# Altium PCB PCBGOST.PcbDoc (part 2 of 3)
Units mm, origin at the board's own origin, x right, y up, seen from the top; angles counter-clockwise.
Board outline 200 x 200 mm, 2 copper layers (Top Layer, Bottom Layer), stack 1.64 mm thick; 237 components, 177 nets, 928 pads, 315 vias.
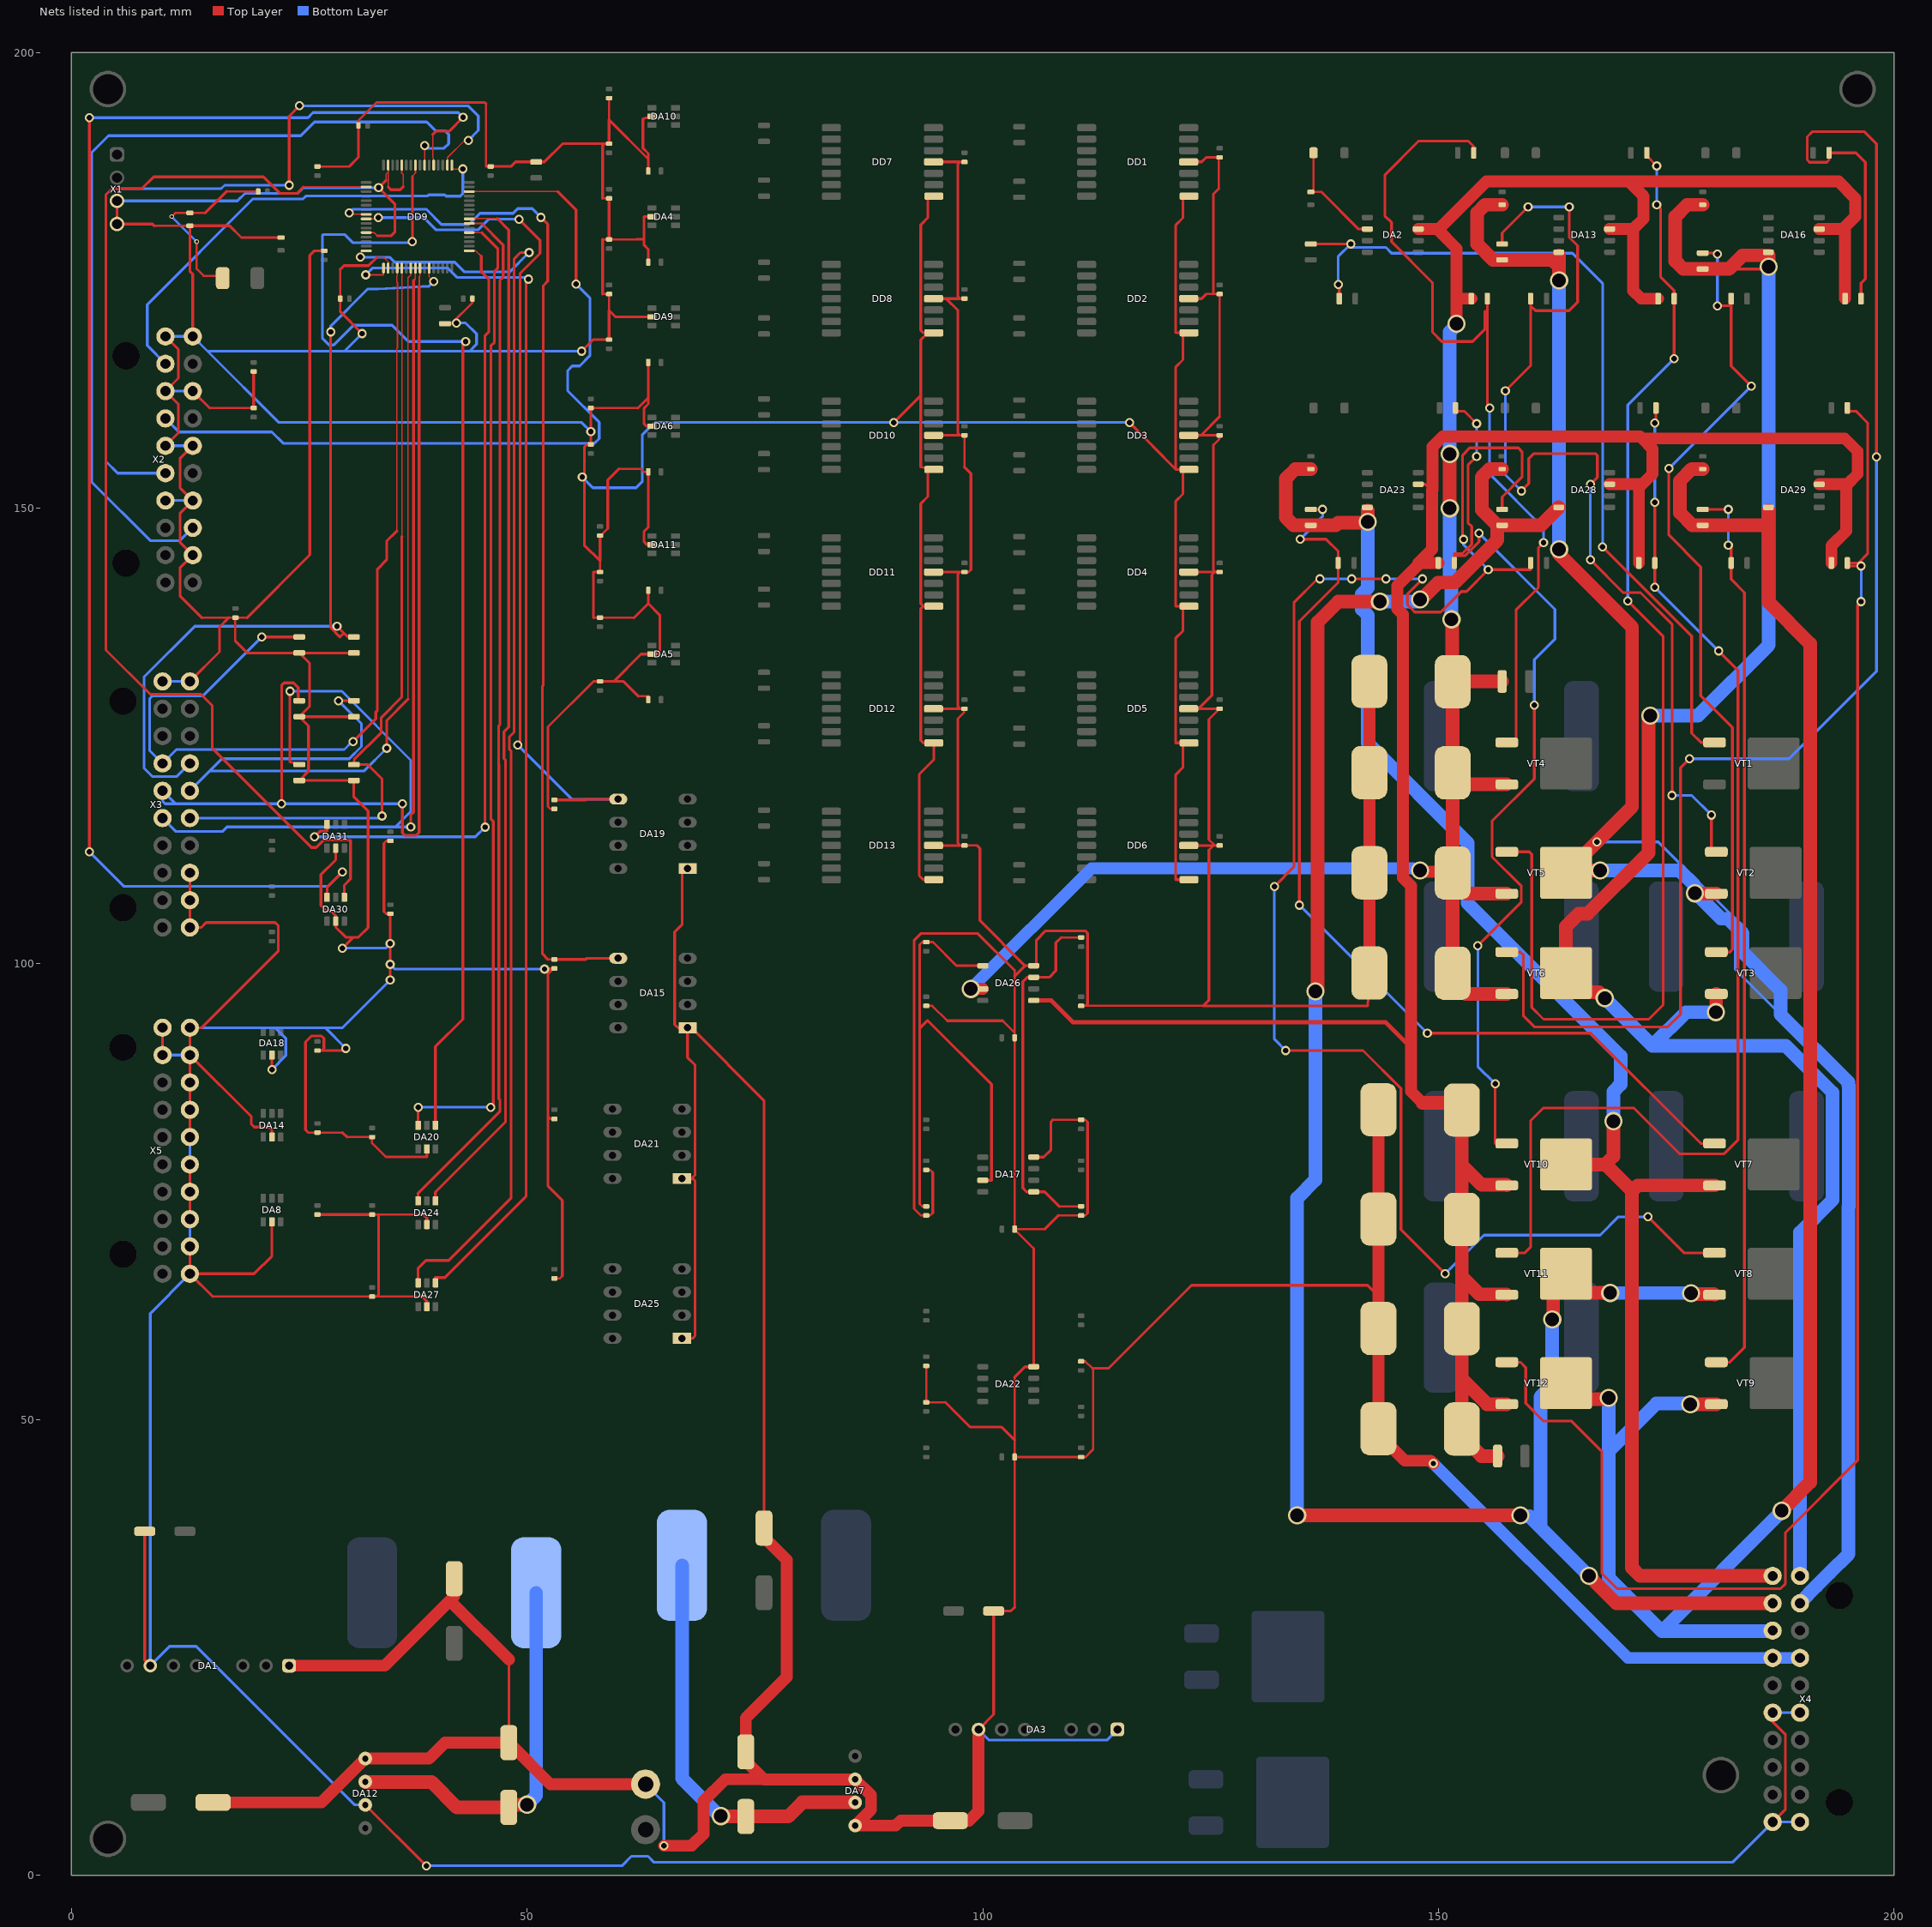
[diagram p2: the nets of this part, all layers, seen from the top]

## Via types
v1: diameter 1, hole 0.6, Top Layer to Bottom Layer, 272 vias
v2: diameter 2, hole 1.5, Top Layer to Bottom Layer, 41 vias
v3: diameter 0.5, hole 0.3, Top Layer to Bottom Layer, 2 vias

## Nets (pads, with @x,y where several pads share a name; then routed paths per layer and width w, separated by ;. In a path a pad name is that pad's centre, name@x,y a point inside that pad or via, vN(x,y) a via of type N, cw(c..) or ccw(c..) an arc to the next point about the centre after c; other vN are vias at no path point) (continued)
D1_2: C45.2 DA23.4 R66.1 VT7.S VT10.D X4.11 | length 179.1
  Top Layer w0.3: DA23.4@142.206,150.095 142.367,150.095 142.367,149.75 142.25,149.75
  Top Layer w1.5: C45.2@136,154.3 134.3,154.3 134.25,154.25 133.25,153.25 133.25,149.004 134.129,148.125 R66.1@136,148.125 138.74,148.125 139.019,148.404 142.154,148.404 v2(142.25,148.5) 142.25,149.75 ; VT10.D@165.5,76.5 VT10.D@164,78 168.321,78 ; v2(169.2,82.75) 169.2,78.879 168.321,78 ; VT7.S@180.3,75.7 171.879,75.7 171.25,75.071 ; X4.11@186.68,32.85 172.129,32.85 171.25,33.729 171.25,75.071 ; 168.321,78 171.25,75.071
  Bottom Layer w1.5: v2(142.25,148.5) 142.25,141.242 141.588,140.58 141.588,138.92 142.25,138.258 142.25,124.237 153.204,113.283 153.204,106.683 170,89.887 170,86.786 169.214,86 169.214,82.764 v2(169.2,82.75)
D2_1: C35.2 DA13.4 R45.1 VT2.S VT5.D X4.2 | length 232.6
  Top Layer w0.3: DA13.4@163.206,178.095 163.373,178.095 163.373,177.75 163.25,177.75 ; VT5.D@164,110 164.25,110.25 v1(167.386,113.386)
  Top Layer w1.5: C35.2@157,183.3 155.129,183.3 154.25,182.421 154.25,179 156,177.25 R45.1@157,177.25 162.5,177.25 163.25,176.5 ; v2(163.25,145.5) 163.25,144.954 171.254,136.95 171.254,117.254 164.25,110.25 v2(167.75,110.25) ; v2(163.25,175) 163.25,176.5 ; 163.25,177.75 163.25,176.5 ; v2(178.154,107.75) 178.179,107.725 180.475,107.725 VT2.S@180.5,107.7 ; X4.2@189.68,29.85 X4.2@189.776,29.754
  Bottom Layer w0.3: v1(167.386,113.386) 174.142,113.386 182.575,104.953 182.575,99.416 187.545,94.445
  Bottom Layer w1.5: v2(163.25,145.5) 163.25,147.45 v2(163.25,175) ; v2(167.75,110.25) 176.487,110.25 178.058,108.679 178.058,107.846 v2(178.154,107.75) ; v2@177.994,107.583 178.039,107.628 178.359,107.628 181.024,104.963 181.774,104.963 183.382,103.355 183.382,101.281 187.55,97.113 187.55,94.45 195,87 195,86.683 195.05,86.633 195.05,73.367 195,73.317 195,35.241 192.963,33.204 191.496,31.737 189.68,29.921 X4.2@189.68,29.85
D2_2: C48.2 DA28.4 R79.1 VT8.S VT11.D X4.12 | length 242.6
  Top Layer w1.5: v2(134.5,39.5) v2(159,39.5) ; v2(136.5,97) 136.75,97.25 136.75,137.5 139,139.75 v2(143.592,139.75) ; v2(148,140) 148.135,140 149.986,141.851 151.806,141.851 156.468,146.512 R79.1@156.468,148.125 ; C48.2@157,154.3 155.629,154.3 154.75,153.421 154.75,149.843 R79.1@156.468,148.125 ; v2(162.5,61) 162.5,61.35 162.6,61.45 162.6,64.6 VT11.D@164,66 166.1,63.9 168.175,63.9 v2(168.854,63.9) ; DA28.4@163.206,150.095 161.236,148.125 R79.1@157,148.125 R79.1@156.468,148.125 ; v2(166.525,32.85) 169.525,29.85 X4.12@186.68,29.85 ; v2(177.725,63.875) 177.812,63.787 180.213,63.787 VT8.S@180.3,63.7
  Bottom Layer w1.5: v2(134.5,39.5) 134.5,74.296 136.5,76.296 v2(136.5,97) ; v2(143.592,139.75) 147.615,139.75 147.865,140 v2(148,140) ; v2(159,39.5) 159.096,39.404 159.971,39.404 161.196,38.179 ; v2(162.5,61) 162.5,53.794 161.196,52.49 161.196,38.179 ; v2(166.525,32.85) 161.196,38.179 ; v2(168.854,63.9) 168.867,63.888 177.713,63.888 v2(177.725,63.875)
D3_1: C41.2 DA16.4 R49.1 VT3.S VT6.D X4.1 | length 219.7
  Top Layer w0.3: R49.1@179,176.25 181.875,176.25 185.369,176.25 185.903,176.784 185.903,178.095 DA16.4@186.206,178.095
  Top Layer w1.5: v2(168.25,96.25) 167.6,96.9 166.1,96.9 VT6.D@164,99 164,104.1 165.412,105.512 166.388,105.512 173.054,112.177 173.054,127.046 v2(173.258,127.25) ; C41.2@179,183.3 177.3,183.3 176,182 176,177.129 176.879,176.25 R49.1@179,176.25 181.875,176.25 183.375,177.75 186.206,177.75 186.25,177.75 v2(186.25,176.5) ; v2(180.458,94.708) 180.479,94.729 180.479,96.679 VT3.S@180.5,96.7
  Bottom Layer w1.5: v2(168.25,96.25) 173.479,91.021 ; v2(173.258,127.25) 178.5,127.25 186.25,135 186.25,137.95 v2(186.25,176.5) ; v2(180.458,94.708) 177.167,94.708 173.479,91.021 ; X4.1@189.68,32.85 189.68,70.543 193.25,74.113 193.25,85.887 188.116,91.021 173.479,91.021
D3_2: C51.2 DA29.4 R98.1 VT9.S VT12.D X4.13 | length 221.1
  Top Layer w0.3: DA29.4@186.206,150.095 186.385,150.095 186.385,149.75 186.25,149.75
  Top Layer w1.5: VT12.D@164,54 165.75,52.25 168.425,52.25 168.55,52.375 v2(168.7,52.375) ; v2(177.65,51.675) 177.663,51.688 180.488,51.688 VT9.S@180.5,51.7 ; C51.2@179,154.3 177.8,154.3 176.5,153 176.5,149.5 177.875,148.125 R98.1@179,148.125 186.125,148.125 186.25,148 ; 186.25,149.75 186.25,148 ; v2(187.676,40) 190.8,43.124 190.8,135.129 186.25,139.679 186.25,148
  Bottom Layer w0.3: 174.525,26.775 183.62,26.775 ; 183.657,26.812 183.62,26.775 ; X4.13@186.617,26.775 183.62,26.775
  Bottom Layer w1.5: v2(168.7,52.375) 168.7,46.55 ; v2(177.65,51.675) 177.225,51.675 177.125,51.775 173.925,51.775 168.7,46.55 ; X4.13@186.68,26.85 186.68,26.775 174.525,26.775 ; v2(187.676,40) 187.676,39.926 174.525,26.775 ; 168.7,46.55 168.7,32.6 174.525,26.775
DPR1_1: DA20.6 DD9.37 | length 108.6
  Top Layer w0.15: DD9.37@43.65,180.25 45.034,180.25
  Top Layer w0.3: DA20.6@38.05,82.3 v1(38.05,84.277) ; 45.034,180.25 46.782,178.502 46.782,176.329 46.421,175.968 46.421,168.215 46.025,167.819 46.025,115.915 46.294,115.646 46.294,84.546 v1(46.025,84.277)
  Bottom Layer w0.3: v1(38.05,84.277) v1(46.025,84.277)
DPR1_2: DA24.4 DD9.40 | length 114.9
  Top Layer w0.15: DD9.40@43.65,181.75 44.132,181.75 44.17,181.788 46.736,181.788
  Top Layer w0.3: DA24.4@39.95,74 39.95,74.968 47.63,82.649 47.63,122.368 47.467,122.531 47.467,125.489 47.982,126.003 47.982,180.542 46.736,181.788
DPR2_1: DA20.4 DD9.57 | length 135.2
  Top Layer w0.15: 37.414,186.436 37.75,186.772 DD9.57@37.75,187.65
  Top Layer w0.3: v1(37.414,179.248) 37.414,186.436 ; DA20.4@39.95,82.3 39.95,90.932 42.951,93.933 42.951,167.996 v1(43.256,168.3)
  Bottom Layer w0.3: v1(37.414,179.248) 37.313,179.146 30.867,179.146 29.972,180.041 27.641,180.041 27.534,179.934 27.534,168.656 28.27,167.919 28.778,167.919 30.937,170.078 35.204,170.078 36.982,168.3 v1(43.256,168.3)
DPR2_2: DA27.6 DD9.16 | length 141.6
  Top Layer w0.15: v1(31.699,177.546) 31.801,177.648 31.801,178.25 DD9.16@32.35,178.25
  Top Layer w0.3: DA27.6@38.05,65 38.05,66.624 38.888,67.462 41.402,67.462 48.235,74.295 48.235,123.385 48.067,123.553 48.067,124.939 48.582,125.454 48.582,177.36 49.276,178.054 v1(50.217,178.054)
  Bottom Layer w0.3: v1(31.699,177.546) 34.923,177.546 35.473,176.996 42.074,176.996 43.14,175.931 48.093,175.931 v1(50.217,178.054)
DPR3_1: DA24.6 DD9.39 | length 113.6
  Top Layer w0.15: DD9.39@43.65,181.25 45.009,181.25
  Top Layer w0.3: DA24.6@38.05,74 38.05,74.848 47.03,83.829 47.03,85.062 46.911,85.181 46.911,121.888 46.867,121.931 46.867,126.089 47.021,126.242 47.021,175.007 47.382,175.368 47.382,178.877 45.009,181.25
DPR3_2: DA27.4 DD9.17 | length 136.3
  Top Layer w0.15: v1(32.301,175.609) 34.25,175.609 DD9.17@34.25,176.35
  Top Layer w0.3: DA27.4@39.95,65 39.95,65.589 40.98,65.589 49.886,74.495 49.886,174.879 v1(50.14,175.133)
  Bottom Layer w0.3: v1(32.301,175.609) 33.065,176.373 41.262,176.373 42.305,175.331 49.942,175.331 v1(50.14,175.133)
DPS_1: DD9.24 R83.2 X3.5 | length 122.8
  Top Layer w0.15: 37.592,175.026 37.725,175.159 37.725,175.854 37.75,175.879 DD9.24@37.75,176.35
  Top Layer w0.3: v1(23.978,129.921) 23.978,122.174 R83.2@25,121.875 ; v1(37.236,115.037) 37.236,116.332 37.55,116.646 37.55,174.984 37.592,175.026
  Bottom Layer w0.3: X3.5@10,116 11.471,114.529 16.555,114.529 17.063,115.037 35.56,115.037 ; v1(23.978,129.921) 29.667,129.921 37.236,122.352 37.236,116.713 35.56,115.037 ; v1(37.236,115.037) 35.56,115.037
DPS_2: DD9.25 R89.2 X3.6 | length 113.5
  Top Layer w0.15: 38.175,174.379 38.175,175.429 38.25,175.504 DD9.25@38.25,176.35
  Top Layer w0.3: v1(23.063,117.577) 23.063,130.556 23.343,130.835 24.384,130.835 24.892,130.327 24.892,128.875 R89.2@25,128.875 ; v1(36.322,117.577) 36.322,114.376 36.576,114.122 37.846,114.122 38.151,114.427 38.151,174.354 38.175,174.379
  Bottom Layer w0.3: v1(36.322,117.577) v1(23.063,117.577) 11.423,117.577 ; 11.423,117.577 X3.6@10,119 10,117.856 10.279,117.577 11.423,117.577
DPS_3: DD9.20 R90.2 X3.7 | length 102.9
  Top Layer w0.15: 35.7,147.502 35.7,167.581 35.775,167.581 35.775,174.775 35.7,174.775 35.7,175.463 35.75,175.513 DD9.20@35.75,176.35
  Top Layer w0.3: v1(20.889,135.875) R90.2@25,135.875 ; v1(30.912,124.384) 33.401,126.873 33.401,127.65 33.579,127.827 33.579,143.322 34.59,144.334 34.59,146.392 35.7,147.502
  Bottom Layer w0.3: v1(20.889,135.875) 14.427,129.413 8.89,129.413 8.585,129.108 8.585,123.415 X3.7@10,122 11.52,123.52 29.947,123.52 30.81,124.384 v1(30.912,124.384)
DPS_4: DD9.21 R93.2 X3.15 | length 85.7
  Top Layer w0.15: DD9.21@36.25,176.35 36.25,175.895 36.271,175.874 36.271,146.914
  Top Layer w0.3: R93.2@31,121.875 R93.2@31.013,121.875 ; v1(34.087,116.23) 34.087,120.3 32.512,121.875 R93.2@31.013,121.875 ; 36.271,146.914 36.246,146.888 36.246,129.284 34.001,127.04 34.001,125.391 31.013,122.403 R93.2@31.013,121.875
  Bottom Layer w0.3: X3.15@13,116 33.856,116 v1(34.087,116.23)
DPS_5: DD9.23 R95.2 X3.16 | length 102.9
  Top Layer w0.15: 36.941,129.055 36.941,175.294 37.25,175.604 DD9.23@37.25,176.35
  Top Layer w0.3: v1(29.312,128.875) R95.2@31,128.875 ; v1(34.601,123.667) 34.601,126.716 36.941,129.055
  Bottom Layer w0.3: X3.16@13,119 15.158,121.158 ; v1(29.312,128.875) 31.826,126.36 31.826,123.85 30.48,122.504 16.504,122.504 15.158,121.158 ; v1(34.601,123.667) 32.093,121.158 15.158,121.158
DPS_6: DD9.27 R96.2 X3.17 | length 91.9
  Top Layer w0.15: DD9.27@39.25,176.35 39.25,175.377 v1(39.758,174.869)
  Top Layer w0.3: v1(28.448,169.345) 28.448,136.891 29.464,135.875 29.896,136.307 ; v1(29.144,137.058) 29.896,136.307 ; R96.2@31,135.875 30.328,135.875 29.896,136.307
  Bottom Layer w0.3: X3.17@13,122 11.574,120.574 8.865,120.574 7.976,121.463 7.976,131.496 13.538,137.058 v1(29.144,137.058) ; v1(28.448,169.345) 28.448,169.991 32.512,174.055 33.666,174.055 39.25,174.361 v1(39.758,174.869)
G1_1: R38.2 R40.1 VT1.G | length 97
  Top Layer w0.3: R38.2@136,179 v1(140.376,179) ; v1(139.014,174.549) 139.125,174.438 R40.1@139.125,173 ; v1(168.021,145.745) 177.8,135.966 177.8,125.316 178.816,124.3 VT1.G@180.3,124.3
  Bottom Layer w0.3: v1(139.014,174.549) 139.014,177.638 v1(140.376,179) 140.376,178.619 144.235,178.619 144.862,177.991 164.705,177.991 168.021,174.676 v1(168.021,145.745)
G1_2: R66.2 R68.1 VT7.G | length 107.3
  Top Layer w0.3: v1(134.747,106.451) 134.747,137.592 139,141.845 R68.1@139,144 139,145.288 137.679,146.609 v1(134.823,146.609) ; R66.2@136,149.875 v1(137.297,149.875) ; v1(148.793,92.405) 166.7,92.405 178.805,80.3 VT7.G@180.3,80.3
  Bottom Layer w0.3: v1(134.747,106.451) v1(148.793,92.405) ; v1(134.823,146.609) 137.297,149.083 v1(137.297,149.875)
G2_1: R45.2 R46.1 VT2.G | length 113.3
  Top Layer w0.3: R45.2@157,179 157,180.216 v1(159.842,183.058) ; v1(157.353,162.89) 160.125,165.662 160.125,172.212 ; v1(159.106,151.892) 159.918,152.705 159.918,155.448 160.452,155.981 167.259,155.981 167.437,155.804 167.437,153.391 v1(166.675,152.629) ; R46.1@160.125,173 160.125,172.212 ; v1(164.363,183.058) 164.363,179.723 165.278,178.808 165.278,172.618 164.338,171.679 160.658,171.679 160.125,172.212 ; v1(166.675,144.336) 170.269,140.741 172.176,140.741 175.641,137.277 v1(175.641,118.491) ; v1(179.959,116.332) 179.959,112.3 VT2.G@180.5,112.3
  Bottom Layer w0.3: v1(157.353,162.89) 157.353,153.645 v1(159.106,151.892) ; v1(159.842,183.058) v1(164.363,183.058) ; v1(166.675,144.336) v1(166.675,152.629) ; v1(175.641,118.491) 177.8,118.491 v1(179.959,116.332)
G2_2: R79.2 R81.1 VT8.G | length 184.3
  Top Layer w0.3: v1(132,108.5) 134.147,110.647 134.147,139.647 136.75,142.25 v1(137,142.25) ; v1(133.25,90.5) 141.733,90.5 145.9,86.333 145.9,70.85 v1(150.75,66) ; v1(140.5,142.25) v1(144.25,142.25) ; v1(148.25,142.25) 148.25,142.236 146.596,140.582 146.596,139.418 147.196,138.818 147.418,138.596 150.249,138.596 150.453,138.8 152.512,140.859 153.076,140.859 v1(155.473,143.256) 160.125,143.256 R81.1@160.125,144 ; v1(152.756,146.583) 152.654,146.685 152.654,155.829 153.441,156.616 158.775,156.616 159.182,156.21 159.182,153.416 157,151.234 R79.2@157,149.875 ; v1(173,72.25) 176.95,68.3 VT8.G@180.3,68.3
  Bottom Layer w0.3: v1@131.999,108.251 v1@131.999,108.499 ; v1@132,108.25 132,91.75 v1(133.25,90.5) ; v1(137,142.25) v1(140.5,142.25) ; v1(144.25,142.25) v1(148.25,142.25) ; v1(150.75,66) 155,70.25 167.75,70.25 169.75,72.25 v1(173,72.25) ; v1(152.756,146.583) 152.756,145.974 v1(155.473,143.256)
G3_1: R49.2 R51.1 VT3.G | length 89.7
  Top Layer w0.3: v1(175.285,154.356) 175.285,147.066 178.791,143.561 178.791,129.413 182.27,125.933 182.27,101.6 181.97,101.3 VT3.G@180.5,101.3 ; R49.2@179,178 180.496,178 v1(180.619,177.876) ; v1(180.619,172.212) 182.125,172.212 ; R51.1@182.125,173 182.125,172.212 ; v1(184.328,163.398) 182.125,165.601 182.125,172.212
  Bottom Layer w0.3: v1(175.285,154.356) v1(184.328,163.398) ; v1(180.619,172.212) v1(180.619,177.876)
G3_2: R98.2 R100.1 VT9.G | length 99.3
  Top Layer w0.3: R98.2@179,149.875 v1(181.813,149.875) ; VT9.G@180.5,56.3 181.979,56.3 183.591,57.912 183.591,140.748 182.125,142.215 R100.1@182.125,144 182.125,145.637 v1(181.813,145.948)
  Bottom Layer w0.3: v1(181.813,145.948) v1(181.813,149.875)
G4_1: R41.1 R42.1 VT4.G | length 94.1
  Top Layer w0.3: R41.1@153.875,189 153.875,189.685 153.264,190.297 147.853,190.297 144.12,186.563 144.12,182.09 144.854,181.356 144.854,179.235 149.352,174.737 149.352,169.316 150.368,168.3 153.746,168.3 155.118,169.672 155.118,171.615 155.375,171.615 ; R42.1@155.375,173 155.375,171.615 ; v1(155.626,161.013) 155.375,161.264 155.375,171.615 ; VT4.G@157.5,124.3 158.521,124.3 158.521,138.836 160.98,141.295 160.98,145.664 v1(161.544,146.228)
  Bottom Layer w0.3: v1(155.626,161.013) 155.626,153.746 161.544,147.828 v1(161.544,146.228)
G4_2: R71.1 R73.1 VT10.G | length 104.1
  Top Layer w0.3: R71.1@151.875,161 151.875,160.655 152.832,160.655 v1(154.203,159.283) ; v1(154.203,155.677) 153.254,154.727 153.254,148.402 153.66,147.996 153.66,146.05 152.639,145.029 151.75,145.029 R73.1@151.75,144 151.75,144.78 152.908,144.78 154.457,146.329 v1(154.457,147.244) ; v1(154.33,102.006) 159.106,106.782 159.106,108.534 155.88,111.76 155.88,115.672 160.528,120.32 v1(160.528,128.397) ; v1(156.235,86.843) 156.235,80.3 VT10.G@157.5,80.3
  Bottom Layer w0.3: v1(154.203,155.677) v1(154.203,159.283) ; v1(154.33,102.006) 154.33,88.748 v1(156.235,86.843) ; v1(154.457,147.244) 162.789,138.913 162.789,135.636 160.528,133.375 v1(160.528,128.397)
G5_1: R47.1 R48.1 VT5.G | length 133.7
  Top Layer w0.3: VT5.G@157.5,112.3 159.969,112.3 160.249,112.021 160.249,95.225 161.544,93.929 173.076,93.929 174.676,95.529 174.676,135.941 v1(170.79,139.827) ; R47.1@172.875,189 172.875,188.646 v1(173.965,187.556) ; v1(173.965,183.312) 174.371,182.905 174.371,175.412 175.875,173.908 R48.1@175.875,173 v1(175.875,166.426)
  Bottom Layer w0.3: v1(170.79,139.827) 170.79,161.341 v1(175.875,166.426) ; v1(173.965,183.312) v1(173.965,187.556)
G5_2: R88.1 R91.1 VT11.G | length 126.9
  Top Layer w0.3: VT11.G@157.5,68.3 159.512,68.3 160.122,68.91 160.122,82.779 161.544,84.201 171.425,84.201 176.454,79.172 181.356,79.172 182.88,80.696 182.88,132.207 v1(180.746,134.341) ; v1(173.75,141.337) R91.1@173.75,144 v1(173.75,150.659) ; v1(173.75,159.36) 173.875,159.485 R88.1@173.875,161
  Bottom Layer w0.3: v1(173.75,141.337) v1(180.746,134.341) ; v1(173.75,150.659) v1(173.75,159.36)
G6_1: R53.1 R56.1 VT6.G | length 171.6
  Top Layer w0.3: VT6.G@157.5,101.3 159.004,101.3 159.334,100.97 159.334,94.285 160.528,93.091 175.184,93.091 176.581,94.488 176.581,121.514 v1(177.571,122.504) ; R56.1@196.375,173 196.375,174.701 196.85,175.176 196.85,187.96 195.809,189.001 192.875,189.001 R53.1@192.875,189 192.875,188.214 192.621,187.96 190.729,187.96 190.475,188.214 190.475,190.754 191.033,191.313 196.748,191.313 198.069,189.992 v1(198.069,155.651)
  Bottom Layer w0.3: v1(177.571,122.504) 188.468,122.504 198.069,132.105 v1(198.069,155.651)
G6_2: R102.1 R103.1 VT12.G | length 188.3
  Top Layer w0.3: VT12.G@157.5,56.3 159.004,56.3 159.588,55.716 159.588,51.791 161.544,49.835 164.617,49.835 167.929,46.523 167.929,33.143 169.627,31.445 187.528,31.445 188.087,32.004 188.087,37.615 196.012,45.54 196.012,139.37 v1(196.393,139.751) ; R103.1@194.875,144 R103.1@194.875,143.993 ; R102.1@194.875,161 194.875,160.655 195.828,160.655 197.104,159.379 197.104,145.009 196.088,143.993 R103.1@194.875,143.993 ; v1(196.393,143.662) 194.875,143.662 R103.1@194.875,143.993
  Bottom Layer w0.3: v1(196.393,139.751) v1(196.393,143.662)
GND: C1.2 C2.2 C3.2 C4.2 C5.2 C6.2 C7.2 C8.2 C12.2 C13.2 C14.2 C15.2 C16.2 C20.2 C21.2 C31.2 C32.2 C33.2 C34.2 C50.1 C52.1 C53.1 DA1.1 DA3.1 DA3.7 DA7.1 DA7.3 DA12.1 DA15.1 DA17.8 DA19.1 DA21.1 DA22.8 DA25.1 DA26.8 DD1.11 DD2.11 DD3.11 DD4.11 DD5.11 DD6.11 DD7.11 DD8.11 DD10.11 DD11.11 DD12.11 DD13.11 R52.2 R55.1 R58.2 R59.2 R60.2 R61.2 R62.2 R64.1 R69.2 R70.1 R76.2 R78.1 R82.1 R84.2 R85.2 R86.2 R87.2 R94.1 X4.4 X4.14 X6.2 | length 989.1
  Top Layer w0.25: 92.481,73.152 93.233,72.4 R52.2@93.8,72.4 94.234,72.4 94.513,72.679 ; R70.1@93.8,55.9 R69.2@93.8,51.9 95.91,51.9 ; R55.1@93.8,77.4 94.234,77.4 94.513,77.121 ; R82.1@93.8,95.4 94.469,95.4 96.096,93.774 ; 97.282,113.254 97.536,113 C15.2@98,113 99.365,113 ; 97.282,126.924 97.942,127.584 C14.2@97.942,128 ; 97.282,128.254 97.536,128 C14.2@97.942,128 ; 97.282,142.746 97.536,143 C13.2@98,143 98.448,143 98.704,143.256 ; 97.282,158.254 97.536,158 C12.2@97.993,158 ; 97.282,173.254 97.536,173 C8.2@98,173 ; 97.282,187.746 97.536,188 C7.2@98,188 ; 97.993,154.508 C12.2@97.993,158 ; C14.2@98,128 C14.2@97.942,128 ; C12.2@98,158 C12.2@97.993,158 ; 102.182,93.774 103.5,92.456 ; 103.5,29.401 C52.1@103.5,45.9 103.5,47.752 103.5,54.657 ; 103.5,99.294 103.5,98.657 103.5,92.456 ; 105.613,68.778 C50.1@103.5,70.891 ; 106.782,70.891 C50.1@103.5,70.891 ; 107.706,82.9 R64.1@110.8,82.9 111.252,82.9 111.506,82.646 ; 108.29,72.4 R58.2@110.8,72.4 111.252,72.4 111.506,72.654 ; R76.2@110.8,45.9 111.28,45.9 112.116,46.736 112.116,55.636 ; R78.1@110.8,56.4 111.265,56.4 112.029,55.636 112.116,55.636 ; R94.1@110.8,95.4 111.252,95.4 ; 111.506,95.654 111.252,95.4 ; 113.807,55.636 112.116,55.636 ; 124.204,95.4 111.252,95.4 ; 124.528,173.5 125.298,173.5 C2.2@126,173.5 126,160.048 ; 124.528,188.5 C1.2@125.908,188.5 ; 124.816,113.66 125.4,113.076 ; 124.816,126.832 125.984,128 C5.2@126,128 ; 124.826,112.503 125.324,113 125.4,113.076 ; 125.146,142.67 125.476,143 125.554,143 ; 125.298,143.256 125.554,143 ; 125.298,156.947 125.959,157.607 125.959,158 C3.2@126,158 ; 125.908,185.064 C1.2@125.908,188.5 ; C6.2@126,113 125.476,113 125.4,113.076 ; C4.2@126,143 125.554,143 ; C1.2@126,188.5 C1.2@125.908,188.5 ; C50.1@103.5,70.891 C50.1@103.5,70.9 C53.1@103.5,91.9 103.5,92.456
  Top Layer w0.3: 42,29.679 42,30.621 ; C34.2@48,14.55 48,23.679 ; DA25.1@67,58.92 68.166,58.92 68.428,59.182 68.428,76.2 68.168,76.46 68.072,76.46 ; DA21.1@67,76.46 68.072,76.46 ; DA19.1@67.62,110.46 67.031,110.46 67.031,104.343 66.192,103.505 66.192,93.356 66.548,93 DA15.1@67.615,93 ; C32.2@74,12.548 C32.2@74,13.55 ; C31.2@76,38.1 76,85.021 68.021,93 DA15.1@67.62,93 DA15.1@67.615,93 ; 76.032,10.516 76.008,10.54 DA7.3@86,10.54 DA7.3@86,10.516 ; 92.481,73.152 92.481,102.616 93.193,103.327 99.466,103.327 103.5,99.294 ; 94.513,72.679 94.513,77.121 ; DD13.11@94.6,113 97.536,113 ; DD12.11@94.6,128 97.536,128 ; DD11.11@94.6,143 97.536,143 ; DD10.11@94.6,158 97.536,158 ; DD8.11@94.6,173 95.986,173 ; DD7.11@94.6,188 97.536,188 ; 95.91,51.9 98.636,49.174 102.078,49.174 103.5,47.752 ; 96.096,93.774 102.182,93.774 ; 97.282,113.254 97.282,126.924 ; 97.282,128.254 97.282,142.746 ; 97.282,158.254 97.282,171.704 95.986,173 ; 97.282,173.254 97.282,187.746 ; 97.536,173 95.986,173 ; 97.993,154.508 98.704,153.797 98.704,143.256 ; 99.365,113 99.695,112.67 99.695,104.758 104.648,99.805 ; DA3.7@99.54,16 101.2,17.66 C21.2@101.2,29 103.099,29 103.5,29.401 ; C52.1@103.5,45.9 R76.2@110.8,45.9 ; 103.5,54.657 104.648,55.805 DA22.8@105.594,55.805 105.613,55.805 105.613,68.778 ; 103.5,98.657 104.648,99.805 ; DA17.8@105.594,78.805 106.68,78.805 107.493,79.618 107.493,82.686 107.706,82.9 ; 106.782,70.891 108.29,72.4 ; 111.506,72.654 111.506,82.646 ; 111.506,95.654 111.506,103.378 111.252,103.632 106.909,103.632 105.893,102.616 105.893,99.805 DA26.8@105.594,99.805 104.648,99.805 ; 113.807,55.636 122.915,64.745 142.24,64.745 143.425,63.56 ; DD6.11@122.6,113 124.282,113 125.324,113 125.476,113 ; DD5.11@122.6,128 123.682,128 ; DD4.11@122.6,143 125.476,143 ; DD3.11@122.6,158 123.952,158 ; DD2.11@122.6,173 124.028,173 124.528,173.5 ; DD1.11@122.6,188 124.028,188 124.528,188.5 ; 124.816,113.66 124.816,126.832 ; 124.826,112.503 124.826,96.023 124.204,95.4 142.245,95.4 R59.2@142.425,99 ; 125.146,142.67 125.146,129.464 123.682,128 ; 125.298,143.256 125.298,156.947 ; 125.298,173.5 125.298,184.455 125.908,185.064 ; C3.2@125.959,158 123.952,158 ; C5.2@125.984,128 123.682,128 ; 126,160.048 123.952,158 ; R84.2@143.425,48.387 R84.2@143.425,49 ; DA15.1@67.615,93 67.615,89.738 68.428,88.925 68.428,76.816 68.072,76.46
  Top Layer w1.3: C16.2@15.55,8 27.44,8 DA12.1@32.25,12.81 39.243,12.81 40.983,14.55 C34.2@48,14.55 52.55,10 X6.2@63,10 ; DA1.1@23.89,23 34.379,23 42,30.621 C33.2@42,32.55 ; 42,29.679 48,23.679 ; v1(65.024,3.251) 68.072,3.251 69.367,4.547 69.367,8.153 71.754,10.54 76.008,10.54 C32.2@74,12.548 ; C32.2@74,13.55 74,17.247 78.5,21.747 78.5,34.6 76.275,36.825 76.275,37.825 C31.2@76,38.1 ; 76.032,10.516 DA7.3@86,10.516 ; DA7.3@86,10.54 87.75,8.79 87.75,7.21 DA7.1@86,5.46 90.455,5.46 90.995,6 C20.2@96.45,6 98.501,6 99.54,7.039 DA3.7@99.54,16 ; R59.2@142.425,99 R60.2@142.425,110 R61.2@142.425,121 R62.2@142.425,131 ; R84.2@143.425,48.387 146.312,45.5 149.14,45.5 v1(149.454,45.187) ; R84.2@143.425,49 R85.2@143.425,60 143.425,63.56 R86.2@143.425,72 R87.2@143.425,84
  Bottom Layer w0.3: X6.2@63,10 65.024,7.976 v1(65.024,3.251) ; DA3.7@99.54,16 100.706,14.834 113.614,14.834 DA3.1@114.78,16
  Bottom Layer w1.3: v1(149.454,45.187) 170.79,23.85 X4.14@186.68,23.85 X4.4@189.68,23.85
GNDD: C9.2 C10.2 C11.2 C17.2 C18.2 C22.2 C23.2 C24.2 C25.2 C26.2 C27.2 C28.1 C29.1 C30.1 C36.2 C37.1 C38.1 C39.1 C40.2 C43.2 C44.2 C46.2 C49.2 C54.2 C55.2 DA1.7 DA4.2 DA5.2 DA6.2 DA8.2 DA9.2 DA10.2 DA11.2 DA12.3 DA14.2 DA18.2 DA20.2 DA24.2 DA27.2 DA30.2 DA31.2 DD1.8 DD2.8 DD3.8 DD4.8 DD5.8 DD6.8 DD7.8 DD8.8 DD9.12 DD9.18 DD9.60 DD9.63 DD10.8 DD11.8 DD12.8 DD13.8 R9.2 R10.2 R11.2 R16.2 R17.2 R22.2 R23.2 R24.2 R25.2 R26.2 R31.2 R36.2 R39.1 R43.1 R44.1 R54.2 R63.2 R72.2 R77.2 R83.1 R89.1 R90.1 R93.1 R95.1 R96.1 X1.3 X1.4 X2.4 X2.6 X2.8 X2.10 X2.12 X2.14 X2.16 X2.18 X2.20 X3.10 X3.11 X3.12 X3.13 X3.20 X4.6 X4.10 X4.16 X4.20 X5.9 X5.10 X5.11 X5.12 X5.13 X5.14 X5.15 X5.16 X5.17 X5.18 X5.19 X5.20 | length 1412.4
  Top Layer w0.15: DD9.12@32.35,180.25 33.223,180.25 33.59,179.883 ; 33.519,177.521 34.29,177.521 34.75,177.061 DD9.18@34.75,176.35 ; 34.517,185.977 34.517,186.673 34.75,186.906 ; 34.75,185.249 34.75,186.906 ; DD9.63@34.75,187.65 34.75,186.906 ; DD9.60@36.25,187.65 36.25,186.762 36.414,186.598 36.414,185.293
  Top Layer w0.25: 9.08,181 C18.2@13,181 13,175.996 ; 14.298,138 17.272,138 R39.1@17.983,138 ; 15.17,161 R43.1@20,161 ; 15.5,63.5 C49.2@33,63.5 33.452,63.5 ; 17.983,135.446 R39.1@17.983,138 ; 19.279,138 R39.1@18,138 R39.1@17.983,138 ; 25.993,81.5 C40.2@27,81.5 29.743,81.5 ; 26.68,178.25 C24.2@27.75,178.25 ; C43.2@27,90.5 27.432,90.5 ; C25.2@27,187.5 30.48,187.5 ; 27.711,90.779 27.432,90.5 ; 29.5,171.566 C26.2@29.5,173 29.5,176.21 ; v1@29.896,90.5 27.432,90.5 ; 30.243,81 C44.2@32.995,81 ; 31.5,188.52 C23.2@31.5,192 31.5,192.532 33.487,194.519 ; C46.2@33,72.5 33.706,72.5 38.636,72.5 ; C44.2@33,81 C44.2@32.995,81 ; 33.706,63.754 33.452,63.5 ; 34.29,105.754 34.544,105.5 C54.2@34.976,105.5 ; 34.29,113.23 34.56,113.5 C55.2@35,113.5 ; 34.503,78.832 32.995,80.34 C44.2@32.995,81 ; v1(34.976,98.222) v1(34.976,99.949) v1(34.976,102.235) C54.2@34.976,105.5 ; C54.2@35,105.5 C54.2@34.976,105.5 ; 38.492,63.5 33.452,63.5 ; 41.682,170.25 44,172.568 C27.2@44,173 ; 45.497,194.392 45.497,187.5 C22.2@46,187.5 ; v1@51.977,99.5 52.578,99.5 ; 52.299,83.279 52.578,83 R72.2@53,83 ; 52.299,98.89 R54.2@52.908,99.5 ; v1@52.299,99.221 52.578,99.5 ; 52.299,117.279 52.578,117 R63.2@53,117 ; 52.299,125.996 57.302,131 R22.2@58,131 59.499,131 60.579,131 ; R77.2@53,65.5 53.594,65.5 53.873,65.779 ; R54.2@53,99.5 R54.2@52.908,99.5 ; 53.892,190 58.555,190 ; v1@56.286,153.416 56.286,156.718 56.568,157 R26.2@57,157 v1(57,158.394) ; R25.2@57,161 62.172,161 ; 57.248,168.5 R16.2@59,168.5 ; 57.277,138 R17.2@58,138 61.752,138 ; 57.277,143 R36.2@58,143 58,144.235 ; R31.2@58,147 58.09,147 58.852,147.762 ; 58.293,173.5 R11.2@59,173.5 59,171.704 ; 58.293,179.5 R10.2@59,179.5 62.027,179.5 ; 58.293,184 R9.2@59,184 ; 58.293,189.738 58.555,190 ; R24.2@59,190 58.555,190 ; 59,192.616 R23.2@59,195 ; 60.096,154.33 62.49,154.33 62.846,153.975 C30.1@63.3,153.975 ; 62.191,129.388 63.3,129.388 C29.1@63.3,129 ; 63.3,139.548 C39.1@63.3,141 ; 63.3,147.933 C30.1@63.3,153.975 ; C30.1@63.3,154 C30.1@63.3,153.975 ; 63.3,161.446 63.3,162.128 C37.1@63.3,166 ; C28.1@63.3,177 63.3,178.406 ; C38.1@63.3,187 63.3,188.316 63.3,188.922 ; 52.578,99.5 R54.2@52.908,99.5
  Top Layer w0.3: X1.3@5,183.73 X1.4@5,181.19 8.89,181.19 9.08,181 ; C17.2@8.05,37.75 8.05,23.6 DA1.7@8.65,23 ; X5.9@10,90 X5.10@10,93 ; X2.6@10.32,156.85 11.735,158.265 11.735,161.435 X2.8@10.32,162.85 11.735,164.265 11.735,167.435 X2.10@10.32,168.85 ; X5.12@13,69 X5.11@13,66 ; X5.13@13,72 X5.14@13,75 X5.15@13,78 ; X5.16@13,81 X5.17@13,84 X5.18@13,87 X5.19@13,90 ; X3.13@13,110 X3.12@13,107 X3.11@13,104 14.236,104 14.783,104.546 22.352,104.546 22.708,104.191 22.708,101.422 14.285,93 X5.20@13,93 X5.19@13,90 ; X3.20@13,131 16.256,134.256 16.256,136.984 17.272,138 ; 13,175.996 13.32,175.676 X2.20@13.32,168.85 ; C18.2@13,181 17.348,181 18.648,179.7 C11.2@23,179.7 ; X2.16@13.32,156.85 11.913,155.443 11.913,152.257 X2.14@13.32,150.85 11.913,149.443 11.913,146.257 X2.12@13.32,144.85 11.913,143.443 11.913,140.386 14.298,138 ; X2.18@13.32,162.85 15.17,161 ; 15.5,63.5 X5.11@13,66 ; 17.983,135.446 19.304,134.125 R90.1@25,134.125 ; 19.279,138 26.165,144.886 26.165,177.735 26.68,178.25 ; R43.1@20,161 R44.1@20,165 ; DA8.2@22,71.7 22,67.945 20.055,66 X5.11@13,66 ; DA14.2@22,81 22,81.788 21.695,82.093 20.066,82.093 19.734,82.424 19.734,83.266 X5.19@13,90 ; v1(22,88.417) DA18.2@22,90 ; 25.993,81.5 25.689,81.804 25.689,91.44 26.349,92.1 27.432,92.1 27.711,91.821 27.711,90.779 ; C36.2@27,72.5 C46.2@33,72.5 ; DA31.2@29,112.7 29,111.423 27.381,109.804 27.381,106.401 27.94,105.842 28.448,105.842 29,105.29 DA30.2@29,104.7 29,104.038 30.107,102.931 30.948,102.931 ; 29.5,171.566 v1(31.902,169.164) ; 29.5,176.21 29.909,176.62 32.618,176.62 33.519,177.521 ; 29.743,81.5 30.243,81 ; v1(29.743,101.727) 30.948,102.931 ; v1@29.896,90.5 v1(30.124,90.729) ; 30.48,187.5 31.5,188.52 ; R93.1@31,120.125 R93.1@30.988,120.125 ; R95.1@31,127.125 R89.1@25,127.125 ; R96.1@31,134.125 R90.1@25,134.125 ; DA12.3@32.25,7.73 v1(38.939,1.041) ; 33.487,194.519 45.37,194.519 45.497,194.392 ; 33.59,179.883 35.052,179.883 35.509,180.34 35.509,183.363 v1(33.706,185.166) 34.517,185.977 ; 33.706,63.754 33.706,72.5 ; 34.29,105.754 34.29,113.23 ; 34.503,78.832 39,78.832 DA20.2@39,79.7 ; 34.75,185.249 35.052,184.947 36.068,184.947 36.414,185.293 ; 38.492,63.5 39,62.992 DA27.2@39,62.4 ; 38.636,72.5 39,72.136 DA24.2@39,71.4 ; C9.2@41,170.25 41.682,170.25 42.158,170.25 v1(42.24,170.332) ; C22.2@46,187.5 48.235,187.5 48.735,188 C10.2@51,188 51.892,188 53.892,190 ; v1(51.918,99.441) v1@51.977,99.5 ; v1@52.299,99.221 52.299,98.89 52.299,83.279 52.299,75.616 53.873,74.041 53.873,65.779 ; 52.299,117.279 52.299,125.996 ; v1(55.982,167.234) 57.248,168.5 ; v1(56.058,153.416) 56.286,153.416 56.286,145.948 58,144.235 R31.2@58,147 ; v1(57,158.394) R25.2@57,161 ; 57.277,138 57.277,143 ; 58.293,173.5 58.293,179.5 ; 58.293,184 58.293,189.738 ; 58.852,147.762 58.852,153.086 60.096,154.33 ; R16.2@59,168.5 59,171.704 59.704,171 DA9.2@63.7,171 ; R10.2@59,179.5 R9.2@59,184 ; R24.2@59,190 59,192.616 63.3,188.316 ; 59.499,131 62.499,134 DA5.2@63.7,134 64.252,134 64.567,134.315 64.567,138.281 63.3,139.548 61.752,138 ; 60.579,131 62.191,129.388 ; 62.027,179.5 62.84,179.5 ; 62.172,161 63.3,162.128 ; 63.3,147.933 62.84,147.472 62.84,146.304 63.144,146 DA11.2@63.7,146 ; 63.3,161.446 62.84,160.985 62.84,159.258 63.098,159 DA6.2@63.7,159 ; 63.3,178.406 62.84,178.867 62.84,179.5 ; 63.3,188.922 62.72,189.502 62.72,192.728 DA10.2@63.7,193 ; DA4.2@63.7,182 62.84,182 62.84,179.5 ; v1(90.221,159.41) 93.193,162.382 ; DD13.8@94.635,109.25 93.472,109.25 93.04,109.682 93.04,120.802 94.64,122.403 94.64,124.25 DD12.8@94.635,124.25 93.472,124.25 93.193,124.529 93.193,138.971 93.472,139.25 ; DD11.8@94.635,139.25 93.472,139.25 ; DD8.8@94.635,169.25 DD8.8@93.98,169.25 ; DD7.8@94.635,184.25 93.98,184.25 93.98,181.889 93.193,181.102 93.193,169.529 93.472,169.25 DD8.8@93.98,169.25 ; v1(116.1,159.41) 121.183,154.25 ; DD6.8@122.635,109.25 121.183,109.25 121.183,120.777 121.971,121.564 DD5.8@121.971,124.25 ; DD5.8@122.635,124.25 DD5.8@121.971,124.25 ; DD4.8@122.635,139.25 DD4.8@121.971,139.25 ; DD3.8@122.635,154.25 DD3.8@121.971,154.25 ; DD2.8@122.635,169.25 DD2.8@121.971,169.25 ; DD1.8@122.635,184.25 121.971,184.25 121.971,181.864 121.183,181.077 121.183,169.25 DD2.8@121.971,169.25 ; X4.20@186.68,5.85 188.087,7.257 188.087,15.435 186.68,16.842 X4.16@186.68,17.85 ; R89.1@25,127.125 26.01,126.115 26.01,121.135 R83.1@25,120.125 R93.1@30.988,120.125 ; R89.1@25,127.125 26.13,128.255 26.13,132.995 R90.1@25,134.125 ; 30.948,102.931 31.496,102.931 32.555,103.99 32.555,116.762 30.988,118.329 R93.1@30.988,120.125 ; 93.193,162.382 93.193,154.529 DD10.8@94.635,154.25 93.98,154.25 93.98,151.282 93.193,150.495 93.193,139.529 93.472,139.25 ; 93.193,162.382 93.193,168.463 DD8.8@93.98,169.25 ; 121.183,154.25 DD3.8@121.971,154.25 ; 121.183,154.25 121.183,165.506 121.971,166.294 DD2.8@121.971,169.25 ; DD5.8@121.971,124.25 121.183,124.25 121.183,135.763 121.971,136.55 DD4.8@121.971,139.25 ; DD4.8@121.971,139.25 121.183,139.25 121.183,150.774 121.971,151.562 DD3.8@121.971,154.25
  Bottom Layer w0.3: X1.3@5,183.73 18.224,183.73 19.032,184.538 24.816,184.538 25.444,185.166 v1(33.706,185.166) ; X5.9@10,90 X5.19@13,90 ; X3.10@10,131 X3.20@13,131 ; X2.4@10.32,150.85 X2.14@13.32,150.85 ; X2.6@10.32,156.85 X2.16@13.32,156.85 ; X2.8@10.32,162.85 X2.18@13.32,162.85 ; X2.10@10.32,168.85 X2.20@13.32,168.85 14.936,167.234 ; X5.11@13,66 8.65,61.65 DA1.7@8.65,23 10.771,25.121 13.699,25.121 31.09,7.73 DA12.3@32.25,7.73 ; X5.12@13,69 X5.13@13,72 ; X5.15@13,78 X5.16@13,81 ; X5.20@13,93 22.352,93 ; v1(22,88.417) 23.52,89.938 23.52,91.832 22.352,93 ; v1(29.743,101.727) 34.468,101.727 v1(34.976,102.235) ; v1(30.124,90.729) 27.853,93 ; v1(31.902,169.164) 29.972,167.234 ; v1(34.976,98.222) 29.754,93 27.853,93 ; v1(34.976,99.949) 35.484,99.441 v1(51.918,99.441) ; v1(38.939,1.041) 60.405,1.041 61.455,2.091 63.263,2.091 63.932,1.422 182.252,1.422 X4.20@186.68,5.85 X4.10@189.68,5.85 ; v1(42.24,170.332) 43.256,170.332 44.45,169.139 44.45,167.996 43.688,167.234 ; v1(55.982,167.234) 43.688,167.234 ; v1(56.058,153.416) 57.226,152.248 61.976,152.248 62.636,152.908 62.636,158.039 64.008,159.41 v1(90.221,159.41) v1(116.1,159.41) ; v1(57,158.394) 55.984,159.41 22.76,159.41 14.936,167.234 ; X4.16@186.68,17.85 X4.6@189.68,17.85 ; 14.936,167.234 29.972,167.234 ; 22.352,93 27.853,93 ; 29.972,167.234 43.688,167.234
I1: DA15.5 DD9.8 R54.1 | length 114.9
  Top Layer w0.15: v1@30.653,182.25 DD9.8@32.35,182.25
  Top Layer w0.25: 52.281,100.5 R54.1@53,100.5
  Top Layer w0.3: v1(30.48,182.423) v1@30.653,182.25 ; v1(51.522,181.915) 52.263,181.174 52.263,174.909 51.77,174.416 51.77,130.561 51.689,130.48 51.689,101.092 52.281,100.5 ; R54.1@53,100.5 56.439,100.5 56.559,100.62 DA15.5@60,100.62
  Bottom Layer w0.3: v1(30.48,182.423) 30.861,182.804 38.953,182.804 40.619,181.138 43.597,181.138 44.821,182.362 48.474,182.362 48.982,182.87 50.567,182.87 v1(51.522,181.915)
I1_Amp: DA17.3 DA26.1 R52.1 R80.1 | length 60
  Top Layer w0.25: 93.091,73.66 93.351,73.4 R52.1@93.8,73.4 ; 93.091,102.108 93.383,102.4 R80.1@93.8,102.4 94.539,102.4
  Top Layer w0.3: 93.091,73.66 93.091,92.964 ; 93.091,102.108 93.091,92.964 ; 94.539,102.4 97.134,99.805 DA26.1@100.006,99.805 ; DA17.3@100.006,76.265 100.965,76.265 100.965,86.792 93.98,93.777 93.904,93.777 93.091,92.964
I1_Meas: C42.2 DA2.7 DA13.7 DA16.7 DA26.3 R42.2 R48.2 R56.2 R59.1 R60.1 R61.1 R62.1 VT4.S VT5.S VT6.S | length 254.2
  Top Layer w1.3: v2(98.695,97.254) 98.754,97.254 98.765,97.265 DA26.3@100.006,97.265 ; DA2.7@147.794,180.635 149.865,180.635 ; v2(148,110.25) 148.134,110.116 151.434,110.116 R60.1@151.575,109.975 ; v2(152,170.25) 152,173 ; R42.2@153.625,173 152,173 ; DA13.7@168.794,180.635 171.385,180.635 ; R48.2@174.125,173 172.25,173 171.385,173.865 171.385,180.635 ; DA16.7@191.794,180.635 194.373,180.635 ; R56.2@194.625,173 194.625,180.383 194.373,180.635 ; 149.865,180.635 150.059,180.635 155.279,185.854 170.896,185.854 ; 149.865,180.635 152,178.5 152,173 ; 170.896,185.854 172.5,184.25 172.5,181.75 171.385,180.635 ; 170.896,185.854 193.896,185.854 195.75,184 195.75,182.012 194.373,180.635
  Top Layer w1.5: v2(151.25,150) v2(151.25,155.961) ; v2(151.444,137.806) 151.509,137.74 151.509,131.041 R62.1@151.575,130.975 ; C42.2@157,131 156.987,130.987 151.588,130.987 R62.1@151.575,130.975 ; VT6.S@157.5,96.7 153.027,96.7 151.575,98.152 R59.1@151.575,98.975 R60.1@151.575,109.152 ; VT5.S@157.5,107.7 153.027,107.7 R60.1@151.575,109.152 ; VT4.S@157.5,119.7 152.777,119.7 R61.1@151.575,120.902 ; R60.1@151.575,109.152 R60.1@151.575,109.975 R61.1@151.575,120.902 ; R61.1@151.575,120.902 R61.1@151.575,120.975 R62.1@151.575,130.975
  Bottom Layer w1.3: v2(98.695,97.254) 111.941,110.5 147.255,110.5 147.371,110.384 147.866,110.384 v2(148,110.25)
  Bottom Layer w1.5: v2(151.25,150) 151.25,141.806 151.444,141.612 v2(151.444,137.806) ; v2(151.25,155.961) 151.25,169.365 152,170.115 v2(152,170.25)
I2: DA19.5 DD9.9 R63.1 | length 98.1
  Top Layer w0.15: DD9.9@32.35,181.75 33.541,181.75 v1(33.68,181.889)
  Top Layer w0.3: v1(48.971,124.028) 49.236,124.293 49.236,175.768 51.425,177.957 51.425,179.411 v1(49.124,181.712) ; R63.1@53,118 56.439,118 56.519,118.08 DA19.5@60,118.08
  Bottom Layer w0.3: v1(33.68,181.889) 38.667,181.889 40.019,180.538 44.586,180.538 45.759,181.712 v1(49.124,181.712) ; v1(48.971,124.028) 54.919,118.08 DA19.5@60,118.08
I2_Amp: DA17.5 DA26.7 R58.1 R92.1 | length 40.1
  Top Layer w0.25: 108.392,73.4 R58.1@110.8,73.4 ; 108.61,102.9 R92.1@110.8,102.9
  Top Layer w0.3: 108.392,73.4 106.797,74.995 DA17.5@105.594,74.995 104.8,74.995 104.397,75.398 104.397,98.057 104.875,98.535 DA26.7@105.594,98.535 107.298,98.535 108.023,99.26 108.023,102.313 108.61,102.9
I2_Meas: C47.2 DA23.7 DA26.5 DA28.7 DA29.7 R73.2 R84.1 R85.1 R86.1 R87.1 R91.2 R103.2 VT10.S VT11.S VT12.S | length 269.6
  Top Layer w0.3: DA23.7@147.794,152.635 148.558,152.635 149.301,151.892 ; 149.301,145.504 149.301,144.272 149.573,144
  Top Layer w0.5: DA26.5@105.594,95.995 107.505,95.995 109.9,93.6 144.2,93.6 147,90.8
  Top Layer w1.3: 148,144 145.496,141.496 145.496,138.963 146.096,138.363 146.096,109.461 147,108.557 147,90.8 147,86 148.25,84.75 ; R73.2@150,144 149.301,144 147.794,144 149.298,145.504 149.298,151.983 149.346,152.031 149.346,156.75 150.461,157.865 172.135,157.865 172.339,157.661 ; DA28.7@168.794,152.635 172.385,152.635 ; R91.2@172,144 172,152.25 172.385,152.635 ; DA29.7@191.794,152.635 194.885,152.635 ; R103.2@193.125,144 193.125,145.875 194.75,147.5 194.75,152.5 194.885,152.635 ; 172.339,157.661 173.5,156.5 173.5,153.75 172.385,152.635 ; 172.339,157.661 194.589,157.661 196,156.25 196,153.75 194.885,152.635
  Top Layer w1.5: 148.25,84.75 151.8,84.75 R87.1@152.575,83.975 152.575,77.925 ; C47.2@156.5,46 154.727,46 152.575,48.152 R84.1@152.575,48.975 152.575,54.475 ; VT12.S@157.5,51.7 155.35,51.7 152.575,54.475 ; VT11.S@157.5,63.7 157.45,63.75 154.5,63.75 152.575,65.675 ; VT10.S@157.5,75.7 157.45,75.75 154.75,75.75 152.575,77.925 ; 152.575,54.475 R85.1@152.575,59.975 152.575,65.675 ; 152.575,65.675 R86.1@152.575,71.975 152.575,77.925
JTCK: DD9.49 X2.9 | length 51.5
  Top Layer w0.15: DD9.49@41.75,187.65 41.75,187.223 v1(42.951,187.223)
  Bottom Layer w0.3: X2.9@10.32,165.85 8.316,167.854 8.316,172.35 19.904,183.938 25.416,183.938 25.73,184.252 39.059,184.252 39.198,184.39 40.959,184.39 41.112,184.237 42.672,184.237 42.951,184.516 v1(42.951,187.223)
JTDI: DD9.50 X2.5 | length 93.2
  Top Layer w0.15: DD9.50@41.25,187.65 41.25,188.468 v1@43.155,190.373
  Top Layer w0.3: v1(23.901,185.445) 23.901,193.015 v1(25.044,194.158) ; v1@43.155,190.373 v1(43.561,190.373)
  Bottom Layer w0.3: X2.5@10.32,153.85 5.08,153.85 3.785,155.145 3.785,184.404 4.445,185.064 16.434,185.064 16.815,185.445 v1(23.901,185.445) ; v1(25.044,194.158) 43.536,194.158 44.653,193.04 44.653,191.465 v1(43.561,190.373)
JTDO: DD9.55 X2.13 | length 97.8
  Top Layer w0.15: DD9.55@38.75,187.65 v1(38.75,189.789)
  Bottom Layer w0.3: X2.13@13.32,147.85 11.916,146.446 8.636,146.446 2.235,152.847 2.235,189.052 4.064,190.881 25.182,190.881 26.681,192.38 38.986,192.38 39.939,191.427 40.973,191.427 41.392,191.008 41.392,189.992 40.894,189.494 39.044,189.494 v1(38.75,189.789)
JTMS: DD9.46 X2.7 | length 90.1
  Top Layer w0.15: DD9.46@43.65,184.75 53.35,184.75
  Top Layer w0.3: 53.35,184.75 55.372,182.728 v1(55.372,174.6)
  Bottom Layer w0.3: X2.7@10.32,159.85 11.801,158.369 21.996,158.369 23.241,157.124 57.404,157.124 57.912,157.632 57.912,159.436 54.458,162.89 54.458,165.1 54.966,165.608 55.778,165.608 56.896,166.726 56.896,173.076 v1(55.372,174.6)
KV1: DA30.6 DD9.53 | length 162.9
  Top Layer w0.15: 39.649,191.008 39.649,188.696 DD9.53@39.75,187.65
  Top Layer w0.3: v1(1.981,112.319) v1(1.981,192.848) ; DA30.6@28.05,107.3 28.05,108.416 v1(29.718,110.084) ; 39.649,191.008 40.005,191.364 41.453,191.364 v1(42.977,192.888)
  Bottom Layer w0.3: v1(1.981,112.319) 5.791,108.509 28.143,108.509 v1(29.718,110.084) ; v1(1.981,192.848) 25.95,192.848 26.512,193.411 42.454,193.411 v1(42.977,192.888)
KV2: DA30.4 DD9.2 | length 125.8
  Top Layer w0.15: 25.453,185.25 DD9.2@32.35,185.25
  Top Layer w0.3: 25.453,185.25 24.741,184.538 22.915,184.538 21.094,186.36 9.017,186.36 7.722,185.064 4.445,185.064 3.785,184.404 3.785,134.442 8.636,129.591 14.224,129.591 15.443,128.372 15.443,123.673 26.34,112.776 26.848,112.776 27.661,113.589 30.632,113.563 30.632,109.344 29.95,108.661 DA30.4@29.95,107.3
KV3: DA31.6 DD9.33 | length 86.3
  Top Layer w0.15: DD9.33@43.65,178.25 44.373,178.25 44.968,177.655
  Top Layer w0.3: v1(26.67,113.941) 27.283,114.554 28.05,114.554 DA31.6@28.05,115.3 ; 44.968,177.655 44.968,175.956 45.812,175.113 45.812,169.358 45.39,168.935 v1(45.39,115.011)
  Bottom Layer w0.3: v1(26.67,113.941) 44.32,113.941 v1(45.39,115.011)
NetC18_1: C18.1 R37.1 ZQ1.2 | length 20.8
  Top Layer w0.25: v3(11,182) 11.4,182.4 C18.1@13,182.4 14.677,182.4 ; v3(13.75,179.25) 13.75,176.25 14.5,175.5 16.35,175.5 ZQ1.2@16.6,175.25 ; 17.037,184.76 20.5,184.76 R37.1@20.5,184.75
  Top Layer w0.3: 14.677,182.4 17.037,184.76
  Bottom Layer w0.25: v3(11,182) v3(13.75,179.25)
NetC19_1: C19.1 DA2.2 VD1.C | length 12.3
  Top Layer w0.25: VD1.C@136.3,189 136.3,185 C19.1@136,184.7 137.169,184.7
  Top Layer w0.3: 137.169,184.7 141.234,180.635 DA2.2@142.206,180.635
NetC32_1: C32.1 DA7.2 L1.2 | length 44.7
  Top Layer w1.5: v2(71.271,6.5) 71.296,6.475 73.975,6.475 C32.1@74,6.45 78.65,6.45 80.2,8 DA7.2@86,8
  Bottom Layer w1.5: L1.2@67,34 67,10.636 71.136,6.5 v2(71.271,6.5)
NetC34_1: C34.1 DA12.2 L2.2 | length 42.8
  Top Layer w1.5: DA12.2@32.25,10.27 32.27,10.25 39.5,10.25 42.3,7.45 C34.1@48,7.45 48,7.575 48.175,7.75 v2(50,7.75)
  Bottom Layer w1.5: v2(50,7.75) 51,8.75 L2.2@51,31